# Altium PCB 莱洛三角形PCB_2022-04-17.pcbdoc (part 2 of 2)
Units mm, origin at the board's own origin, x right, y up, seen from the top; angles counter-clockwise.
Board outline 174.24 x 150.62 mm, 2 copper layers (Top Layer, Bottom Layer); 157 components, 93 nets, 468 pads, 212 vias.
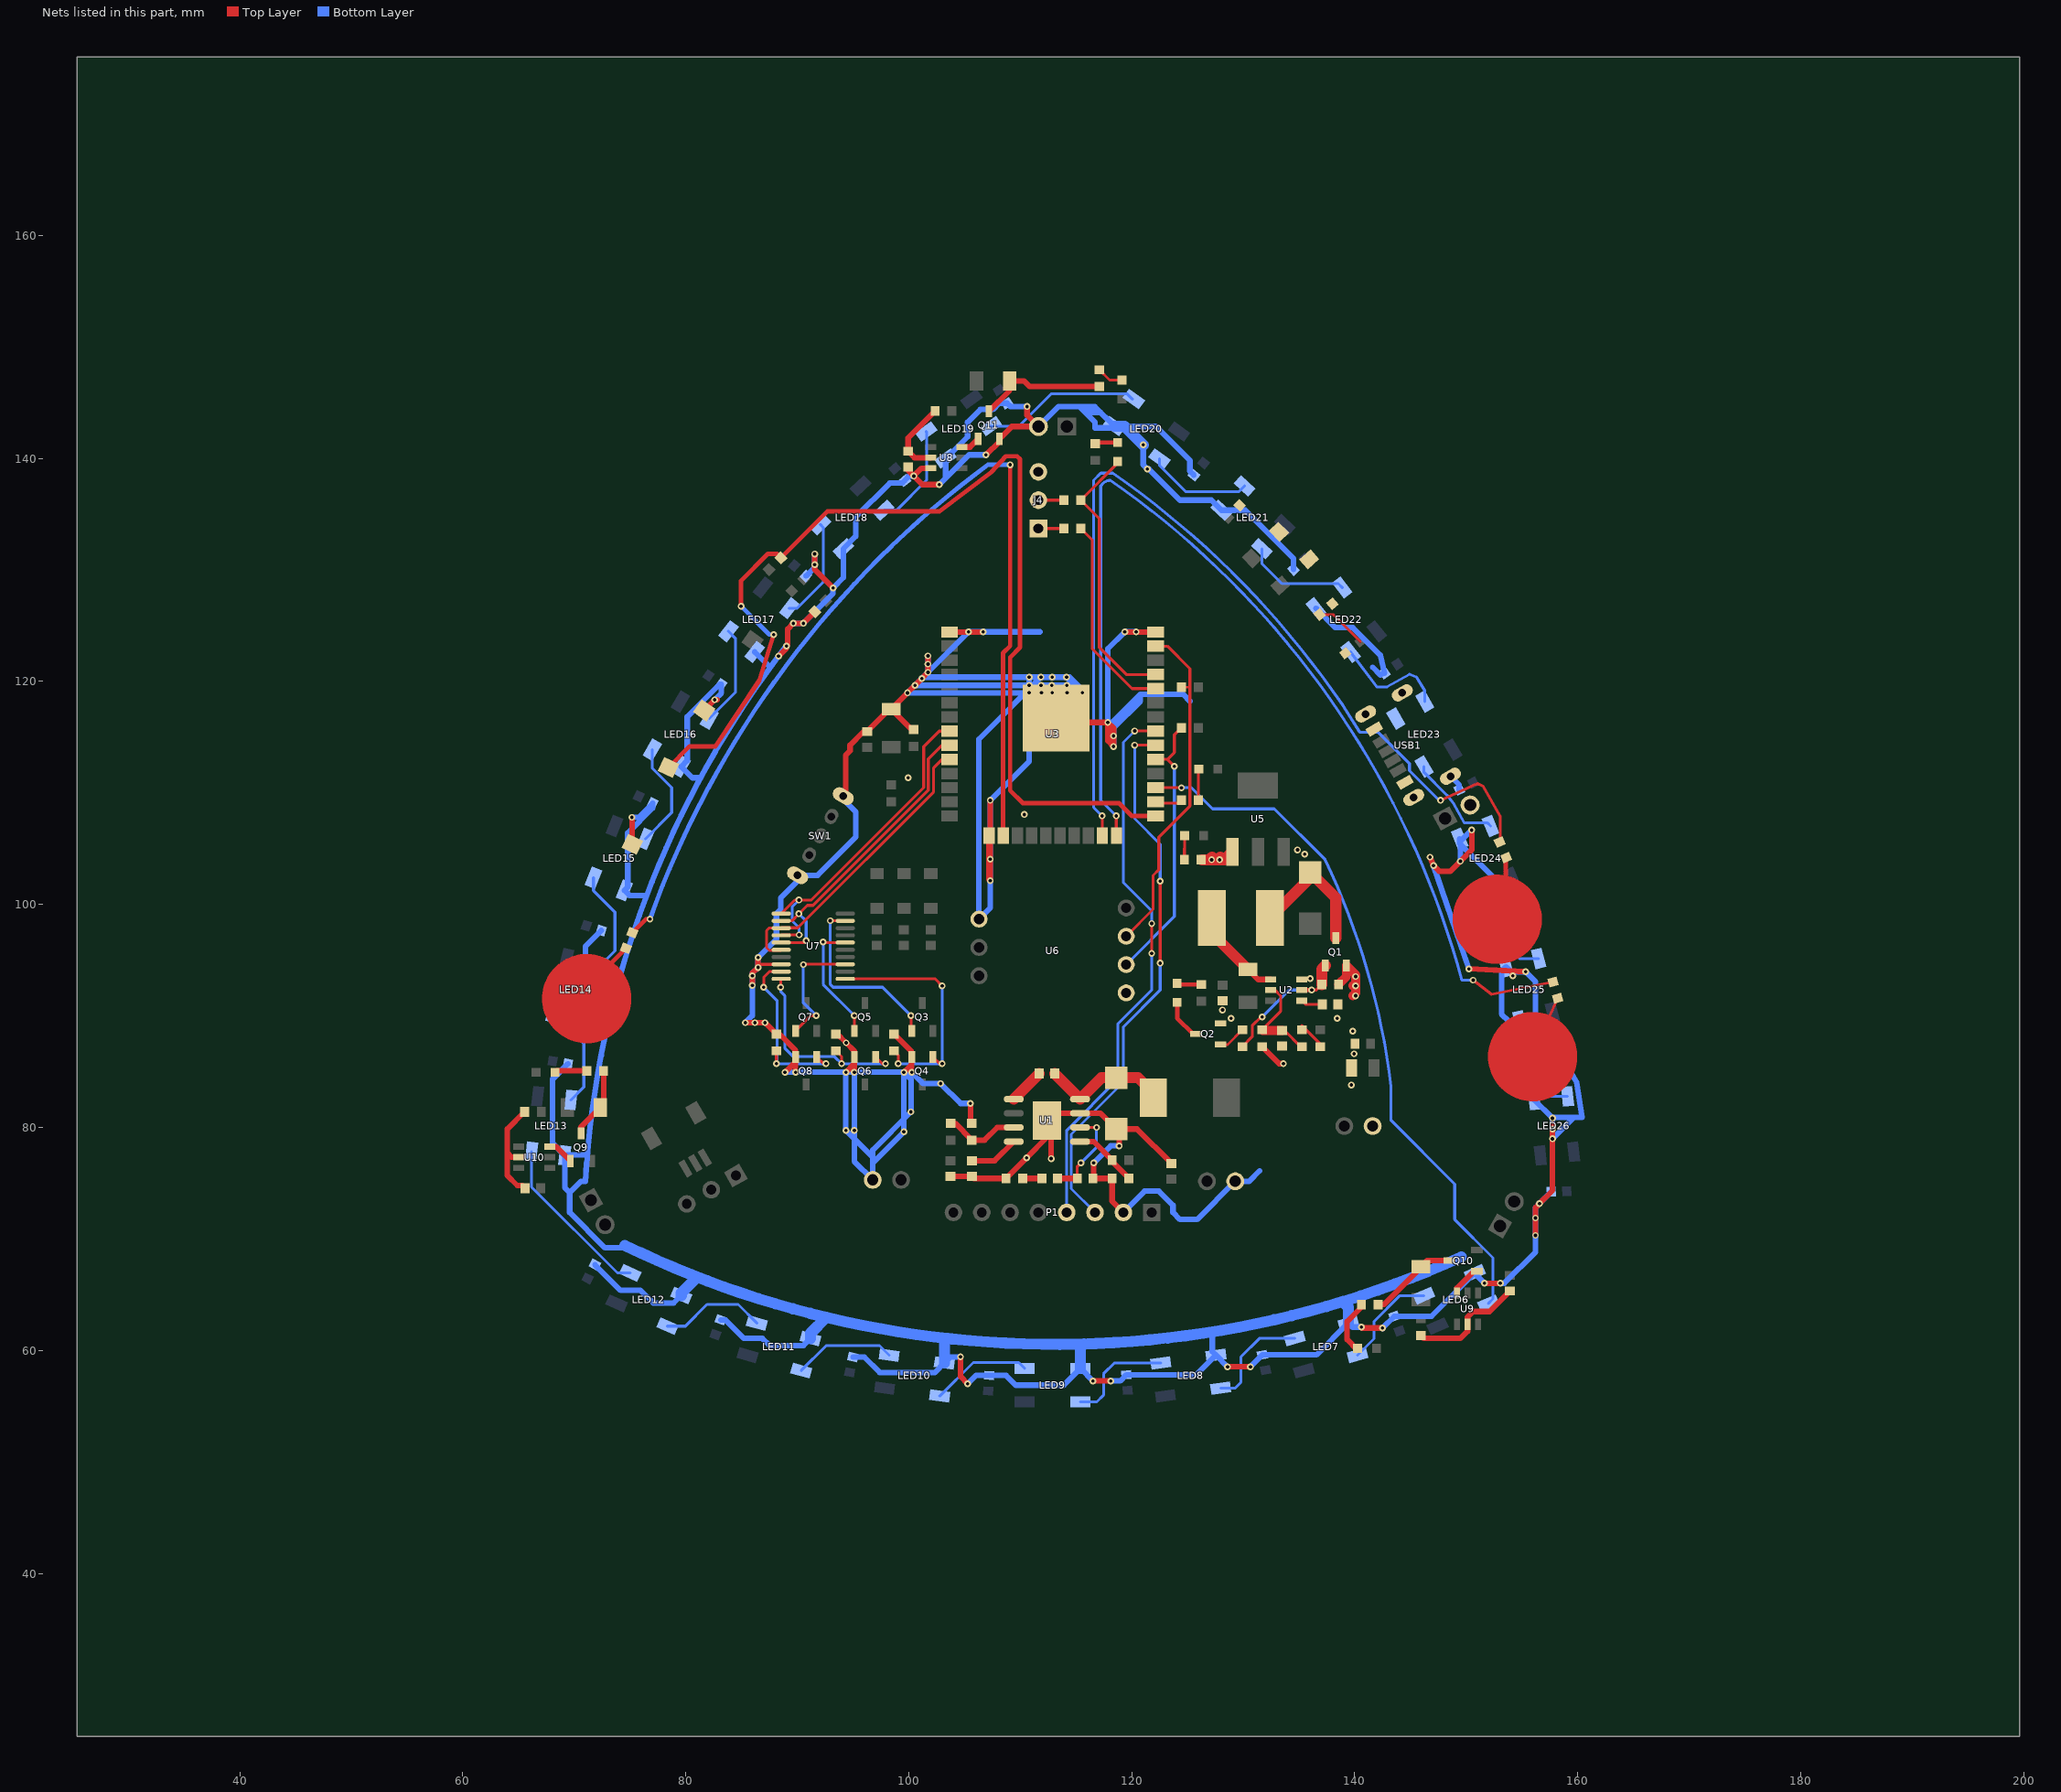
[diagram p2: the nets of this part, all layers, seen from the top]

## Via types
v1: diameter 0.61, hole 0.305, Top Layer to Bottom Layer, tented both sides, 202 vias
v2: diameter 0.7, hole 0.4, Top Layer to Bottom Layer, tented both sides, 6 vias
v3: diameter 0.8, hole 0.5, Top Layer to Bottom Layer, tented both sides, 4 vias

## Nets (pads, with @x,y where several pads share a name; then routed paths per layer and width w, separated by ;. In a path a pad name is that pad's centre, name@x,y a point inside that pad or via, vN(x,y) a via of type N, cw(c..) or ccw(c..) an arc to the next point about the centre after c; other vN are vias at no path point) (continued)
GND: C1.1 C4.2 C5.1 C7.2 C8.1 C10.1 C11.1 C12.1 C13.1 C15.1 C16.2 C17.2 C21.1 C22.1 C23.1 C24.1 C25.1 C26.1 C27.1 C28.1 C29.1 C30.1 C31.1 C32.1 C33.1 C34.1 C35.1 C36.1 C37.1 C38.1 C39.1 C40.1 C41.1 C43.1 C45.2 C48.2 D1.2 D2.2 D7.2 D8.1 J3.2 J4.3 J6.2 KEY1.2 KEY2.2 LED6.3 LED7.3 LED8.3 LED9.3 LED10.3 LED11.3 LED12.3 LED13.3 LED14.3 LED15.3 LED16.3 LED17.3 LED18.3 LED19.3 LED20.3 LED21.3 LED22.3 LED23.3 LED24.3 LED25.3 LED26.3 P1.2 Q1.2 Q2.2 Q4.2 Q6.2 Q8.2 Q11.2 R6.1 R8.1 R9.1 R10.1 R12.2 R15.1 R20.1 R31.1 R32.1 R33.1 R38.2 R40.1 SW1.4 SW1.5 U1.7 U1.9 U2.6 U3.1 U3.15 U3.38 U3.39 U5.1 U6.1 U6.7 U7.8 U8.3 USB1.0 USB1.A12 USB1.B12 | length 888.6
  Top Layer w0.3: v1(86.487,94.348) 86.766,94.627 U7.8@88.569,94.628
  Top Layer w0.5: v1(75.184,107.81) 75.183,105.427 KEY2.2@75.229,105.382 ; KEY1.2@81.64,117.398 82.595,118.351 v1@82.803,118.351 ; v1(85.344,89.395) v1(86.2,89.395) v1(87.113,89.395) 88.137,88.371 88.401,88.371 89.854,86.916 Q8.2@89.855,86.312 ; v1(85.979,92.728) v1(85.979,93.586) 85.979,93.84 v1(86.487,94.348) v1(86.487,95.237) ; v1(88.328,122.261) 89.027,122.96 v1(89.027,123.177) ; v1(88.9,84.95) 89.854,85.905 Q8.2@89.855,86.312 ; v1(89.027,123.177) 89.153,123.304 89.153,124.701 v1(89.661,125.209) v1(90.55,125.209) C13.1@91.58,126.238 ; v1(89.855,84.95) Q8.2@89.855,86.312 ; v1(91.567,131.432) v1(91.567,130.484) 91.567,130.035 v1(93.218,128.384) ; R32.1@93.471,88.371 93.608,88.371 v1(94.391,87.587) 95.125,86.852 Q6.2@95.125,86.312 ; SW1.5@94.125,109.71 94.36,109.946 94.36,113.398 94.741,113.779 94.741,114.287 95.95,115.496 96.265,115.496 98.282,117.51 D2.2@98.425,117.511 ; v1(94.361,84.95) 95.125,85.714 Q6.2@95.125,86.312 ; v1(95.126,84.95) Q6.2@95.125,86.312 ; R33.1@98.678,88.371 100.268,86.781 Q4.2@100.269,86.312 ; v1(99.568,84.95) 100.268,85.651 Q4.2@100.269,86.312 ; C48.2@99.948,139.242 99.948,138.925 v1(100.457,138.417) 101.157,139.118 U8.3@101.978,139.118 ; v1(100.269,84.95) Q4.2@100.269,86.312 ; R6.1@100.456,115.676 100.261,115.676 D2.2@98.425,117.511 ; v1(100.457,138.417) 101.219,137.655 v1(102.743,137.655) ; v1(101.727,122.288) v1(101.727,121.553) v1(101.727,120.813) v1(101.185,120.271) v1(100.556,119.642) v1(99.89,118.976) D2.2@98.425,117.511 ; U3.1@103.657,124.434 v1(106.68,124.447) ; C8.1@103.758,75.615 105.663,75.615 105.854,75.425 108.721,75.425 110.573,77.279 112.394,79.098 U1.9@112.394,80.632 ; v1(104.648,59.423) 104.648,57.645 v1(105.283,57.01) ; v1(105.537,82.156) 105.536,80.497 R10.1@105.663,80.37 ; v1(106.934,140.322) 108.137,141.526 Q11.2@108.138,141.754 109.247,142.862 J3.2@111.633,142.862 ; U3.15@107.213,106.172 107.213,102.227 v1(107.314,102.126) v1(107.314,109.334) ; v1(110.617,144.653) 110.617,143.878 J3.2@111.633,142.862 ; v1(112.776,77.203) 112.775,80.251 U1.9@112.394,80.632 ; U3.39@113.208,116.713 113.601,116.319 v1(117.856,116.319) ; v1(116.522,57.264) v1(118.11,57.264) ; v1(116.586,76.822) 116.585,75.491 116.522,75.425 118.246,75.425 118.246,73.383 P1.2@119.252,72.377 ; v1(118.872,78.346) 118.871,79.603 D1.2@118.617,79.857 ; v1(119.379,124.447) U3.38@122.149,124.434 ; C5.1@123.57,76.761 120.474,79.857 D1.2@118.617,79.857 ; v1(128.594,58.534) v1@130.649,58.534 ; R38.2@131.698,87.246 133.22,85.725 v1(133.604,85.725) ; v1(140.589,62.09) 140.666,62.013 v1(142.494,62.013) ; v1(146.756,104.239) v1(147.066,103.492) 147.574,102.984 148.59,102.984 v1(149.476,103.87) 150.495,104.889 v1(150.495,106.667) ; v1(150.241,94.221) v1(155.321,93.967) ; v1(151.638,66.027) v1(153.058,66.027) ; v1(156.21,70.316) v1(156.21,71.878) 156.21,72.815 v1(156.574,73.179) 157.734,74.339 157.734,80.251 ; U1.9@112.394,80.632 113.029,81.267 U1.7@115.366,81.267 117.208,81.267 D1.2@118.617,79.857 ; 117.856,114.668 v1(118.364,114.16) 118.364,115.811 v1(117.856,116.319) 117.856,114.668
  Top Layer w0.8: R40.1@138.548,92.824 139.252,93.53 Q1.2@139.253,94.51 140.08,93.682 v1(140.081,93.533) ; v1@139.827,91.808 140.081,92.062 v1(140.081,92.705) ; v1@139.827,92.705 140.081,92.959 v1(140.081,93.533)
  Top Layer w1: R20.1@126.314,104 126.961,104 v1@127.215,104.254 ; v1(127.165,104) 127.686,104 v1@127.94,104.254 ; v1(127.889,104) 128.305,104 U5.1@129.019,104.714
  Bottom Layer w0.3: LED20.3@118.433,142.888 119.354,142.887 v1(121.031,141.211)
  Bottom Layer w0.5: C28.1@69.445,85.704 68.071,84.333 68.071,78.575 LED13.3@69.157,77.489 ; 69.595,74.155 69.156,74.594 LED13.3@69.157,77.489 ; 71.18,77.551 69.217,77.551 LED13.3@69.157,77.489 ; C27.1@71.858,67.691 74.157,65.392 75.945,65.392 77.088,64.249 78.927,64.249 LED12.3@79.597,64.92 ; C29.1@72.425,97.658 70.997,96.23 70.997,89.563 71.19,89.367 73.04,89.367 ; 74.53,69.425 74.307,69.202 72.771,69.202 69.596,72.377 69.596,74.155 70.594,75.153 71.003,75.153 cw(c157.821,69.964) v1(89.027,123.177) ; v1(75.184,107.81) 75.77,107.81 77.04,109.08 77.04,108.651 74.802,106.413 74.802,101.567 LED15.3@74.498,101.262 74.952,100.807 76.502,100.807 ; 81.333,111.361 80.594,111.361 79.595,112.359 80.136,112.903 80.136,116.827 83.06,119.748 83.2,119.748 83.2,118.955 v1@82.595,118.351 ; C26.1@83.137,62.74 83.55,62.74 85.216,61.074 86.867,61.074 87.502,60.439 90.555,60.439 LED11.3@91.188,61.074 ; LED17.3@86.187,122.641 87.512,121.315 87.624,121.315 ; v1(86.487,95.237) 88.137,96.888 88.137,99.174 88.518,99.555 88.518,100.571 90.025,102.077 SW1.4@90.025,102.608 91.825,102.608 95.249,106.032 95.249,108.318 94.124,109.443 SW1.5@94.125,109.71 ; v1(86.487,95.237) v1(86.487,94.348) 85.979,93.84 v1(85.979,93.586) v1(85.979,92.728) 85.979,90.03 v1(85.344,89.395) v1(87.113,89.395) ; v1(89.661,125.209) v1(90.55,125.209) 93.218,127.876 v1(93.218,128.384) ; v1(89.855,84.95) v1(88.9,84.95) v1(100.269,84.95) 101.285,83.934 v1(102.87,83.934) 104.648,82.156 v1(105.537,82.156) ; C32.1@90.784,129.456 91.566,130.241 v1(91.567,131.432) ; v1(93.218,128.384) 94.144,129.308 94.144,131.904 95.249,133.012 95.249,134.734 98.297,137.782 99.412,137.782 C33.1@99.645,138.014 100.047,138.417 v1(100.457,138.417) ; v1(94.361,84.95) v1(94.361,79.743) 96.774,77.33 C7.2@96.774,75.298 ; C25.1@94.998,59.408 96.029,59.408 97.408,58.026 102.351,58.026 103.202,58.877 103.748,59.423 v1(104.648,59.423) ; v1(95.126,84.95) v1(95.122,79.743) 95.122,76.95 C7.2@96.774,75.298 ; v1(100.556,119.642) v1(110.806,119.641) v1(111.873,119.641) v1(112.838,119.641) v1(114.172,119.641) 114.914,119.641 v1(115.569,118.986) ; v1(101.185,120.271) 101.297,120.383 v1(110.806,120.383) ; v1(101.727,122.288) v1(101.727,120.813) ; v1(102.743,137.655) 103.314,138.226 103.314,139.971 105.282,141.94 105.282,143.243 106.425,144.386 107.568,144.386 108.132,144.95 108.828,144.95 109.125,144.653 v1(110.617,144.653) ; 103.313,138.225 105.41,140.322 v1(106.934,140.322) ; v1(105.283,57.01) 106.029,57.757 C24.1@107.205,57.756 108.729,57.757 109.6,56.883 113.903,56.883 115.402,58.384 v1(116.522,57.264) v1@116.585,57.264 ; v1(106.68,124.447) v1(105.361,124.447) ; J3.2@111.633,142.862 113.411,144.64 115.316,144.64 ; 111.76,124.447 v1(105.361,124.447) ; 115.579,144.377 116.713,143.243 116.713,142.735 ; 116.585,144.132 117.19,144.132 LED20.3@118.433,142.888 ; v1(116.586,76.822) 118.11,78.346 v1(118.872,78.346) ; 116.712,142.735 118.28,142.735 LED20.3@118.433,142.888 ; 116.918,144.132 115.824,144.132 115.316,144.64 ; v1(117.856,116.319) 118.364,115.811 ; v1(118.11,57.264) 118.968,57.264 C23.1@119.524,57.821 125.806,57.82 LED8.3@127.556,59.573 ; v1(118.364,114.16) v1(118.364,115.111) 118.364,115.811 ; P1.2@119.252,72.377 121.157,74.282 122.425,74.282 123.697,73.009 123.697,72.377 124.332,71.742 125.856,71.742 C4.2@129.286,75.171 ; v1(120.395,124.447) v1(119.379,124.447) 117.855,122.923 v1(117.856,116.319) 118.236,116.319 120.776,118.859 ; v1(121.031,141.211) 121.031,140.957 121.031,139.433 v1(121.412,139.052) 121.539,139.052 124.333,136.258 ; 124.332,136.258 127.149,136.258 LED21.3@128.048,135.359 130.184,135.359 134.505,131.041 C36.1@134.505,130.027 ; 125.221,118.224 124.586,118.859 120.776,118.859 ; C35.1@125.569,138.507 125.221,138.854 125.221,139.814 122.173,142.862 118.46,142.862 LED20.3@118.433,142.888 ; 127.23,61.668 127.23,59.898 LED8.3@127.556,59.573 ; v1@128.65,58.534 v1(128.594,58.534) LED8.3@127.556,59.573 ; C4.2@129.286,75.171 130.54,75.171 131.474,76.105 ; v1@130.555,58.534 v1(130.649,58.534) C22.1@131.714,59.599 136.573,59.598 139.425,62.451 139.786,62.09 v1(140.589,62.09) ; LED22.3@136.522,126.565 138.259,124.828 139.826,124.828 142.298,122.356 C37.1@142.679,120.749 142.298,120.578 141.604,121.272 ; v1@142.493,61.963 v1(142.494,62.013) 143.537,63.058 146.88,63.058 LED6.3@150.776,66.953 150.776,66.888 v1(151.638,66.027) v1@151.51,66.154 ; v1(147.066,103.492) v1(150.241,94.221) ; USB1.0@148.587,111.495 149.361,110.721 C38.1@149.361,110.291 ; LED24.3@149.41,105.888 149.41,105.465 153.034,101.841 153.034,98.496 C39.1@153.141,98.392 ; v1(149.476,103.87) 149.476,105.648 v1(150.495,106.667) ; v1(153.058,66.027) 153.416,66.027 156.21,68.821 v1(156.21,70.316) v1(156.21,71.878) 156.21,72.815 v1(156.574,73.179) ; v1@156.575,73.18 C41.1@157.619,74.224 ; v1(157.734,80.825) LED26.3@156.1,82.459 156.1,83.154 154.304,84.95 154.304,87.871 153.796,88.379 153.796,89.522 153.161,90.157 153.161,93.995 153.575,94.406 154.015,93.967 v1(155.321,93.967) 156.225,93.065 C40.1@156.225,86.464 157.992,84.696 159.511,84.696 159.892,84.061 160.4,80.886 ; C7.2@96.774,75.298 96.774,77.965 v1(100.203,81.394) 100.203,84.315 v1(99.568,84.95) v1(99.568,79.616) 96.774,76.822 C7.2@96.774,75.298 ; v1(101.727,120.813) v1(105.361,124.447) ; v1(101.727,120.813) v1(99.89,118.976) v1(110.806,118.983) v1(111.898,118.983) v1(112.863,118.984) v1(114.197,118.985) v1(115.569,118.986) ; v1(110.806,120.383) 110.806,112.826 v1(107.314,109.334) v1(107.314,104.049) v1(107.314,102.126) 107.314,99.694 U6.1@106.303,98.682 106.303,114.826 v1(111.86,120.383) ; v1(110.806,120.383) v1(111.86,120.383) ; v1(111.86,120.383) v1(112.876,120.383) v1(114.159,120.383) ; v1(114.159,120.383) v1(115.569,118.986) ; v1(114.159,120.383) 114.427,120.383 115.569,119.241 v1(115.569,118.986) ; 115.316,144.64 115.896,144.64 116.682,144.64 LED20.3@118.433,142.888 ; 118.364,115.811 120.776,118.223 120.776,118.859 ; v1(157.734,78.981) 159.639,80.886 160.401,80.886 157.795,80.886 v1(157.734,80.825) v1(157.734,79.862) v1(157.734,78.981)
  Bottom Layer w1: 74.53,69.425 ccw(c113.157,148.958) 149.572,68.388 ; LED12.3@79.597,64.92 79.598,65.14 81.038,66.581 ; LED11.3@91.188,61.074 91.188,61.536 92.613,62.961 ; LED10.3@103.202,58.877 103.202,60.802 103.471,61.074 ; LED9.3@115.402,58.384 115.402,60.269 115.712,60.579 ; LED20.3@118.433,142.888 119.354,142.887 v1(121.031,141.211) ; 138.927,64.381 139.425,63.883 LED7.3@139.425,62.451
  other v1: 110.574,77.278 139.7,83.807 139.954,86.601 139.827,88.633 128.905,89.789 138.43,89.789 128.143,90.534 140.081,91.808 136.017,93.345 154.178,93.586 135.509,104.508 134.874,104.889 110.363,108.064 99.949,111.366 82.594,118.351
GPIO0: KEY2.1 R13.1 U3.25 | length 96.6
  Top Layer w0.4: KEY2.1@78.44,112.27 80.347,114.178 82.674,114.178 86.613,120.129 v1(87.884,124.193) ; v1(84.963,126.733) 84.962,129.032 87.375,131.445 88.188,131.445 R13.1@88.544,131.089 92.697,135.242 102.745,135.242 107.444,138.798 ; 107.441,138.798 108.711,140.195 109.727,140.195 109.981,139.941 109.981,123.05 109.092,122.161 109.092,110.223 110.235,109.08 118.871,109.08 120.027,107.924 U3.25@122.149,107.924
  Bottom Layer w0.4: v1(84.963,126.733) 87.503,124.193 v1(87.884,124.193)
GPIO4: R21.1 U3.26 | length 2.4
  Top Layer w0.254: U3.26@122.148,108.94 122.288,109.08 R21.1@124.459,109.08
KEY1: R19.1 | length 16.3
  Top Layer w0.254: 156.694,88.206 R19.1@158.196,91.592
  Top Layer w4: 157.956,86.347 ccw(c155.956,86.347) 157.956,86.347
KEY2: R18.1 | length 15.4
  Top Layer w0.4: 153.542,101.333 153.542,104.155 R18.1@153.583,104.196
  Top Layer w4: 154.781,98.666 ccw(c152.781,98.666) 154.781,98.666
KEY3: R17.1 | length 16.4
  Top Layer w0.4: 72.168,93.258 72.168,93.583 R17.1@74.648,96.063
  Top Layer w4: 73.12,91.554 ccw(c71.12,91.554) 73.12,91.554
LED2_2: LED2.2 Q2.3 | length 3.3
  Top Layer w0.4: LED2.2@124.078,91.084 124.078,89.796 Q2.3@125.496,88.379
LED6_2: LED6.2 LED7.4 | length 9.1
  Bottom Layer w0.254: LED7.4@140.251,59.567 141.731,61.049 141.731,62.598 144.053,64.919 LED6.2@146.209,64.919
LED7_2: LED7.2 LED8.4 | length 9.8
  Bottom Layer w0.254: LED8.4@127.975,56.601 129.257,56.601 129.793,57.137 129.793,59.423 131.444,61.074 LED7.2@134.617,61.074
LED9_4: LED8.2 LED9.4 | length 9.8
  Bottom Layer w0.254: LED9.4@115.402,55.384 116.865,55.384 117.474,55.994 117.474,57.899 118.452,58.877 LED8.2@122.605,58.877
LED10_2: LED10.2 LED11.4 | length 9.2
  Bottom Layer w0.254: LED11.4@90.362,58.188 92.61,60.439 97.383,60.439 LED10.2@98.25,59.572
LED10_4: LED9.2 LED10.4 | length 9.1
  Bottom Layer w0.254: LED10.4@102.784,55.905 105.793,58.915 109.872,58.915 LED9.2@110.403,58.384
LED11_2: LED11.2 LED12.4 | length 9.5
  Bottom Layer w0.254: LED12.4@78.377,62.179 79.974,62.179 81.914,64.122 84.711,64.122 LED11.2@86.382,62.451
LED12_2: LED12.2 LED13.4 | length 15.2
  Bottom Layer w0.254: LED13.4@66.175,77.818 66.174,74.655 73.878,66.954 LED12.2@75.031,66.954
LED14_4: LED13.2 LED14.4 | length 9.5
  Bottom Layer w0.254: LED14.4@68.09,90.303 70.865,87.525 70.865,83.619 LED13.2@69.706,82.459
LED15_2: LED15.2 LED16.4 | length 9.7
  Bottom Layer w0.254: LED15.2@76.396,105.888 78.739,108.232 78.739,110.477 77.005,112.212 LED16.4@77.004,113.873
LED15_4: LED14.2 LED15.4 | length 9.4
  Bottom Layer w0.254: LED15.4@71.724,102.4 71.724,101.239 73.659,99.301 73.659,95.836 LED14.2@72.232,94.407
LED16_2: LED16.2 LED17.4 | length 9
  Bottom Layer w0.254: LED16.2@82.117,116.677 84.454,119.014 84.454,123.875 LED17.4@83.832,124.5
LED17_2: LED17.2 LED18.4 | length 9.3
  Bottom Layer w0.254: LED17.2@89.285,126.565 90.002,126.565 92.328,128.892 92.328,133.814 LED18.4@92.072,134.074
LED19_4: LED18.2 LED19.4 | length 9.3
  Bottom Layer w0.254: LED18.2@97.759,135.359 98.922,135.359 101.599,138.036 101.599,142.369 LED19.4@101.562,142.407
LED20_2: LED20.2 LED21.4 | length 9.4
  Bottom Layer w0.254: LED20.2@122.493,139.971 122.493,139.369 124.84,137.02 129.613,137.02 LED21.4@130.12,137.528
LED20_4: LED19.2 LED20.4 | length 14.2
  Bottom Layer w0.254: LED19.2@107.246,142.887 109.867,142.887 112.763,145.783 119.598,145.783 LED20.4@120.058,145.326
LED21_2: LED21.2 LED22.4 | length 9.4
  Bottom Layer w0.254: LED21.2@131.663,131.905 131.663,130.578 133.476,128.765 138.533,128.765 LED22.4@138.876,128.424
LED22_2: LED22.2 LED23.4 | length 10.2
  Bottom Layer w0.254: LED22.2@139.621,122.641 141.98,119.517 142.897,119.517 144.906,120.637 145.541,120.383 146.278,119.184 LED23.4@146.279,118.19
LED24_4: LED23.2 LED24.4 | length 8.8
  Bottom Layer w0.254: LED23.2@146.212,112.36 146.212,111.841 148.254,109.796 148.843,109.08 149.831,107.302 151.909,107.302 LED24.4@152.186,107.026
LED25_2: LED25.2 LED26.4 | length 9.4
  Bottom Layer w0.254: LED25.2@154.81,89.562 155.066,89.303 155.066,85.331 157.609,82.788 LED26.4@159.082,82.788
LED25_4: LED24.2 LED25.4 | length 9.3
  Bottom Layer w0.254: LED24.2@151.308,101.262 152.145,100.424 152.145,97.777 154.774,95.148 LED25.4@156.481,95.148
LED27_2: LED27.2 R23.2 | length 2.9
  Top Layer w0.5: LED27.2@68.287,84.95 68.414,85.077 R23.2@71.129,85.077
LO1: Q4.1 R33.2 U7.11 | length 22.3
  Top Layer w0.254: U7.11@94.312,93.329 102.366,93.329 v1(102.997,92.697) ; R33.2@98.678,86.865 99.059,86.484 v1(99.06,85.712) ; Q4.1@102.169,86.312 102.77,85.712 v1(102.997,85.712)
  Bottom Layer w0.254: v1(99.06,85.712) v1(102.997,85.712) v1(102.997,92.697)
LO2: Q6.1 R32.2 U7.10 | length 18.5
  Top Layer w0.254: v1(88.518,92.57) 88.518,93.279 U7.10@88.569,93.329 ; R32.2@93.471,86.865 93.979,86.357 v1(93.98,85.712) ; Q6.1@97.026,86.312 97.627,85.712 v1(97.917,85.712)
  Bottom Layer w0.254: v1(88.518,92.57) 88.518,92.189 88.881,91.826 88.881,87.128 89.662,86.347 93.345,86.347 v1(93.98,85.712) v1(97.917,85.712)
LO3: Q8.1 R31.2 U7.9 | length 16.7
  Top Layer w0.254: v1(86.994,92.57) 86.994,93.459 87.502,93.967 U7.9@88.569,93.978 ; v1(88.138,85.712) R31.2@88.137,86.865 ; Q8.1@91.755,86.312 92.356,85.712 v1(92.583,85.712)
  Bottom Layer w0.254: v1(86.994,92.57) 88.183,91.381 88.183,85.757 v1(88.138,85.712) v1(92.583,85.712)
M0_IN1: U3.8 U7.1 U7.4 | length 29.3
  Top Layer w0.254: U7.4@88.569,97.228 88.61,97.269 v1(90.17,97.269) ; U7.1@88.572,99.179 89.781,100.391 v1(90.16,100.39) 91.259,100.391 101.345,110.477 101.345,114.16 102.727,115.544 U3.8@103.657,115.544
  Bottom Layer w0.254: v1(90.16,100.39) 89.535,99.765 89.535,98.539 90.17,97.904 v1(90.17,97.269)
M0_IN2: U3.9 U7.2 U7.5 | length 28.2
  Top Layer w0.254: U7.5@88.569,96.578 90.621,96.578 v1(90.805,96.761) ; U7.2@88.569,98.528 89.524,98.529 v1(90.157,99.161) ; v1(90.157,99.161) 90.911,99.915 91.419,99.915 91.551,100.047 101.754,110.251 101.754,113.045 102.984,114.274 U3.9@103.657,114.274
  Bottom Layer w0.254: v1(90.157,99.161) 90.805,98.513 v1(90.805,96.761)
M0_IN3: U3.10 U7.3 U7.6 | length 27
  Top Layer w0.254: U7.6@88.569,95.928 88.513,95.872 87.502,95.872 87.248,96.126 87.248,97.65 87.477,97.879 U7.3@88.569,97.878 88.595,97.904 90.042,97.904 102.234,110.096 102.234,112.255 102.984,113.004 U3.10@103.657,113.004
Q1_3: D3.2 L2.2 Q1.3 | length 12.4
  Top Layer w1: L2.2@132.397,98.793 136.016,102.412 136.016,102.872 138.302,100.586 Q1.3@138.303,96.98
Q9_3: Q9.3 R23.1 R25.1 | length 6.5
  Top Layer w0.5: Q9.3@70.612,79.454 70.611,80.043 R25.1@72.345,81.775 72.636,82.064 R23.1@72.635,85.077
Q10_3: Q10.3 R22.1 R27.1 | length 8.1
  Top Layer w0.5: R22.1@142.104,64.122 142.62,64.122 145.922,67.424 R27.1@145.923,67.506 146.476,68.059 Q10.3@148.498,68.059
Q11_3: Q11.3 R24.1 R30.1 | length 11.7
  Top Layer w0.5: Q11.3@107.188,144.224 109.047,146.083 R30.1@109.048,146.939 110.362,146.939 110.86,146.441 R24.1@117.093,146.441
R1_2: J4.1 R1.2 | length 2.3
  Top Layer w0.254: J4.1@111.633,133.718 R1.2@113.928,133.718
R2_2: J4.2 R2.2 | length 2.3
  Top Layer w0.254: J4.2@111.633,136.258 R2.2@113.928,136.258
R7_1: LED1.1 R7.1 | length 2.1
  Top Layer w0.4: R7.1@116.712,141.33 116.811,141.427 LED1.1@118.745,141.427
R8_2: C9.1 R8.2 | length 1.7
  Top Layer w0.5: R8.2@110.227,75.425 C9.1@111.953,75.425
R14_1: LED2.1 R14.1 | length 2.2
  Top Layer w0.4: LED2.1@124.078,92.786 124.109,92.816 R14.1@126.237,92.816
R15_2: LED3.2 R15.2 | length 4.7
  Top Layer w0.254: R15.2@136.837,125.995 138.076,125.994 140.497,123.573
R16_2: L2.1 R16.2 U2.1 | length 8.4
  Top Layer w0.5: R16.2@130.429,94.176 131.338,93.266 U2.1@132.458,93.266
  Top Layer w1: L2.1@127.191,98.793 127.19,97.414 R16.2@130.429,94.176
R20_2: LED4.2 R20.2 | length 2.2
  Top Layer w0.254: R20.2@124.723,104 LED4.2@124.752,106.159
R21_2: LED5.2 R21.2 | length 2.8
  Top Layer w0.254: R21.2@125.975,109.334 125.976,112.049 LED5.2@126.022,112.128
R22_2: LED28.2 R22.2 | length 5
  Top Layer w0.5: LED28.2@140.245,60.058 139.318,60.985 139.318,62.598 140.598,63.878 R22.2@140.598,64.122
R24_2: LED29.2 R24.2 | length 2.4
  Top Layer w0.254: R24.2@117.094,147.946 118.013,147.028 LED29.2@119.126,147.028
R37_1: C45.1 R37.1 R38.1 U2.2 | length 9
  Top Layer w0.254: R38.1@131.698,88.752 133.349,90.403 133.349,91.808 132.841,92.316 U2.2@132.458,92.316 ; C45.1@133.476,88.699 133.7,88.699 135.153,87.246 R37.1@135.254,87.246
  Top Layer w0.8: R38.1@131.698,88.752 131.752,88.699 C45.1@133.476,88.699
R37_2: R37.2 R39.1 | length 2.6
  Top Layer w0.254: R37.2@135.254,89.133 136.905,87.482 R39.1@136.905,87.246
R41_1: Q2.1 R41.1 | length 2.5
  Top Layer w0.254: Q2.1@127.995,87.429 128.6,87.429 R41.1@129.92,88.752
RGB_IN: LED6.4 U3.27 | length 62.6
  Top Layer w0.254: U3.27@122.149,110.464 v1(124.46,110.464)
  Bottom Layer w0.254: v1(124.46,110.464) 125.361,110.464 127.253,108.572 132.78,108.572 137.347,104.005 ; 137.347,104.005 cw(c77.965,75.719) 143.256,83.68 ; 143.255,83.68 143.255,80.632 148.97,74.917 148.97,71.742 152.399,68.313 152.399,64.617 LED6.4@151.996,64.213
RXD0: R1.1 U3.34 | length 18.4
  Top Layer w0.254: R1.1@115.434,133.718 116.458,132.694 116.458,122.923 120.027,119.354 U3.34@122.149,119.354
SCL_0: P1.3 U3.30 | length 48.9
  Top Layer w0.254: v1(120.268,114.287) U3.30@122.149,114.274 ; v1(122.555,94.729) v1(122.555,102.095)
  Bottom Layer w0.254: P1.3@116.712,72.377 114.579,74.508 114.579,79.387 119.252,84.061 119.252,89.014 122.555,92.316 v1(122.555,94.729) ; v1(120.268,114.287) 120.268,107.683 122.555,105.396 v1(122.555,102.095)
SCL_1: R35.1 U3.29 U6.6 | length 24.9
  Top Layer w0.254: U3.29@122.149,113.004 123.202,113.004 ; v1(123.825,112.382) 123.202,113.004 ; R35.1@124.469,115.811 124.409,115.811 123.824,115.227 123.824,113.627 123.202,113.004
  Bottom Layer w0.254: U6.6@119.503,94.602 123.825,98.924 v1(123.825,112.382)
SDA_0: P1.4 U3.31 | length 49.7
  Top Layer w0.254: v1(120.269,115.557) U3.31@122.149,115.544 ; v1(121.793,95.618) v1(121.793,98.285)
  Bottom Layer w0.254: P1.4@114.172,72.377 114.172,79.743 118.744,84.315 118.744,89.268 121.793,92.316 v1(121.793,95.618) ; v1(120.269,115.557) 119.252,114.541 119.252,101.968 121.793,99.427 v1(121.793,98.285)
SDA_1: R34.1 U3.37 U6.5 | length 31
  Top Layer w0.254: U6.5@119.504,97.142 121.919,99.56 121.919,102.603 122.427,103.111 122.427,106.032 125.221,108.826 125.221,121.145 123.202,123.164 U3.37@122.149,123.164 ; R34.1@124.469,119.494 125.221,119.476
TXD0: LED1.2 R2.1 U3.35 | length 24.8
  Top Layer w0.254: LED1.2@118.745,139.725 118.744,139.57 R2.1@115.434,136.258 117.093,134.599 117.093,123.05 119.519,120.624 U3.35@122.149,120.624
U1_1: C2.2 U1.1 | length 3.2
  Top Layer w1: U1.1@109.423,82.537 C2.2@111.696,84.823
U1_3: R5.1 R10.2 U1.3 | length 6.8
  Top Layer w0.5: R5.1@103.758,80.37 104.157,80.37 105.663,78.864 106.816,78.864 107.949,79.997 U1.3@109.423,79.997
U1_4: C12.2 U1.4 | length 4.5
  Top Layer w0.5: C12.2@105.663,77.015 107.711,77.015 U1.4@109.423,78.727
U1_5: R4.1 R9.2 U1.5 | length 5.8
  Top Layer w0.5: U1.5@115.366,78.727 116.595,78.727 118.246,77.076 118.246,76.931 R9.2@119.752,75.425
U1_6: C9.2 C10.2 U1.6 | length 8.5
  Top Layer w0.254: C10.2@115.121,75.425 115.12,76.499 v1(115.443,76.822) ; U1.6@115.366,79.997 v1(116.84,79.997)
  Top Layer w0.5: C9.2@113.352,75.425 C10.2@115.121,75.425
  Bottom Layer w0.254: v1(115.443,76.822) 116.84,78.219 v1(116.84,79.997)
U1_8: C2.1 D1.1 L1.1 U1.8 | length 11
  Top Layer w1: C2.1@113.095,84.823 U1.8@115.366,82.537 117.286,84.457 118.617,84.457 120.573,84.457 L1.1@121.856,83.172
U2_4: C43.2 U2.4 | length 2
  Top Layer w0.254: U2.4@135.258,91.366 135.579,91.046 C43.2@137.096,91.046
U2_5: Q1.1 R40.2 R41.2 U2.5 | length 13.6
  Top Layer w0.254: R41.2@129.92,87.246 130.809,88.135 130.809,89.123 131.592,89.903 v1(131.699,89.903) ; U2.5@135.258,92.316 135.272,92.329 v1(136.144,92.329) 136.547,92.329 R40.2@137.042,92.824
  Top Layer w0.4: U2.5@135.258,92.316 v1(136.144,92.329)
  Top Layer w1: R40.2@137.042,92.824 137.042,94.198 Q1.1@137.353,94.51
  Bottom Layer w0.254: v1(131.699,89.903) 134.125,92.329 v1(136.144,92.329)
U3_16: R17.2 U3.16 | length 89.4
  Top Layer w0.4: R17.2@75.212,97.46 76.436,98.681 v1(76.791,98.682) ; U3.16@108.483,105.918 108.457,105.943 108.457,122.542 109.092,123.177 109.092,134.226 ; 109.093,134.226 v1(109.093,139.433)
  Bottom Layer w0.4: v1(76.791,98.682) cw(c159.131,69.075) 107.095,139.422 ; 107.096,139.423 v1(109.093,139.433)
U3_23: R18.2 U3.23 | length 86.3
  Top Layer w0.254: v1(117.348,107.937) 117.347,106.197 U3.23@117.373,106.172 ; v1(147.701,109.334) 151.002,110.858 151.51,110.604 153.034,107.937 153.034,105.623 R18.2@152.995,105.582
  Bottom Layer w0.254: v1(117.348,107.937) 116.585,108.699 116.585,138.036 117.225,138.676 118.32,138.676 ; 118.32,138.675 cw(c72.136,72.377) 137.033,120.51 138.937,117.843 140.461,115.43 142.112,115.43 144.906,112.636 144.906,112.001 147.573,109.334 v1(147.701,109.334)
U3_24: R19.2 U3.24 | length 97.6
  Top Layer w0.254: v1(118.618,107.937) 118.617,106.197 U3.24@118.643,106.172 ; v1(150.622,93.205) 152.272,91.935 R19.2@157.78,93.04
  Bottom Layer w0.254: 117.22,137.528 117.22,109.334 v1(118.618,107.937) ; 117.231,137.522 cw(c118.11,137.02) 118.108,138.033 cw(c72.136,72.25) 149.606,93.205 149.733,93.205 v1(150.622,93.205)
U7_13: Q7.1 U7.13 | length 11.2
  Top Layer w0.254: Q7.1@89.855,88.668 91.216,90.03 v1(91.694,90.03) ; v1(90.551,94.602) 90.578,94.627 U7.13@94.312,94.627
  Bottom Layer w0.254: v1(90.551,94.602) 90.551,91.173 v1(91.694,90.03)
U7_16: Q5.1 U7.16 | length 11.1
  Top Layer w0.254: v1(92.329,96.634) 92.384,96.578 U7.16@94.312,96.578 ; v1(95.123,90.03) Q5.1@95.125,88.668
  Bottom Layer w0.254: v1(92.329,96.634) 92.329,92.824 v1(95.123,90.03)
U7_19: Q3.1 U7.19 | length 16.8
  Top Layer w0.254: v1(92.963,98.539) U7.19@94.312,98.529 ; v1(100.203,90.03) 100.202,88.735 Q3.1@100.269,88.668
  Bottom Layer w0.254: v1(92.963,98.539) 92.963,92.824 93.217,92.57 97.662,92.57 v1(100.203,90.03)
U8_2: C48.1 R29.1 U8.2 | length 6.9
  Top Layer w0.5: U8.2@101.978,140.068 100.522,140.068 99.948,140.642 99.948,141.838 R29.1@102.371,144.259
U8_6: Q11.1 U8.6 | length 1.8
  Top Layer w0.5: U8.6@104.778,141.018 105.501,141.018 Q11.1@106.238,141.754
U9_2: C47.1 R28.1 U9.2 | length 10.6
  Top Layer w0.5: R28.1@145.922,61.338 146.186,61.074 149.478,61.074 150.113,61.709 U9.2@150.114,62.341 150.113,62.979 150.621,63.487 152.084,63.487 C47.1@153.923,65.328
U9_6: Q10.1 U9.6 | length 2.9
  Top Layer w0.5: U9.6@149.164,65.141 149.163,65.585 150.687,67.109 Q10.1@150.968,67.109
U10_2: C46.1 R26.1 U10.2 | length 9.6
  Top Layer w0.5: U10.2@65.021,77.33 64.388,77.33 64.007,77.711 ; R26.1@65.541,81.394 64.007,79.862 64.007,77.711 ; C46.1@65.595,74.536 65.341,74.79 64.896,74.79 64.007,75.679 64.007,77.711
U10_6: Q9.1 U10.6 | length 2.4
  Top Layer w0.5: U10.6@67.821,78.28 68.366,78.28 Q9.1@69.662,76.984
pads on no net: CN2.4 CN2.5 LED26.2 P1.5 P1.6 P1.7 P1.8 SW1.1 U3.4 U3.5 U3.7 U3.11 U3.12 U3.13 U3.14 U3.17 U3.18 U3.19 U3.20 U3.21 U3.22 U3.28 U3.32 U3.33 U3.36 U6.2 U6.4 U8.1 U8.4 U8.5 U9.1 U9.4 U9.5 U10.1 U10.4 U10.5 USB1.A5 USB1.B5

## Polygon pours and split planes (outlines as drawn)
GND on Bottom Layer (solid): 44.958,38.1 40.513,42.545 40.513,158.727 38.989,159.512 40.005,159.512 39.497,160.02 48.768,160.02 49.276,159.512 176.149,159.512 184.277,151.384 184.277,50.673 171.704,38.1 44.958,38.1
GND on Top Layer (solid): 133.096,91.808 133.096,90.538 129.286,90.538 129.286,91.808 129.032,92.062 128.651,92.062 128.651,93.332 131.699,93.332 131.699,91.808
GND on Top Layer (solid): 125.984,119.367 125.857,119.24 125.857,115.811 125.857,113.779 127.254,112.255 127.254,109.461 135.636,109.461 132.969,115.303 130.556,119.113 127.635,122.034 125.857,122.034
GND on Top Layer (solid): 46.101,156.21 170.434,156.21 178.435,148.209 178.435,53.848 168.402,43.815 42.037,43.815 38.1,39.878 38.1,142.113 48.133,152.146 50.165,152.146
GND on Top Layer (solid): 186.944,110.49 98.068,141.605 74.803,141.605 62.27,154.138 53.086,157.353 59.055,157.353 53.086,163.322 134.112,163.322 140.081,157.353 146.685,157.353 162.433,141.605 155.829,141.605 186.944,110.49

## Other copper
Top Layer:
  drawing of 398 lines, arcs and shapes, not listed
Bottom Layer:
  region net +3.3V: 114.046,139.687 115.697,139.687 115.632,139.622 115.632,121.973 114.427,123.177 112.49,123.177 114.046,124.733
  region net SCL_1: 119.455,95.362 120.264,94.554 120.326,95.246 120.147,95.425
  region net SCL_0: 115.927,72.327 116.761,73.163 116.044,73.224 115.864,73.044
  region net SDA_0: 114.763,72.897 113.582,72.897 114.045,73.449 114.299,73.449
  region net B3+: 139.784,79.773 138.627,79.455 138.799,78.921 139.908,79.226
  region net +5V: 121.589,102.114 121.266,101.791 121.402,101.625 121.755,101.978
  region net +5V: 121.084,101.866 121.083,102.323 120.87,102.345 120.87,101.845
  region net +5V: 120.449,101.866 120.448,102.323 120.235,102.345 120.235,101.845
  region net +5V: 120.852,101.866 120.852,102.324 121.065,102.345 121.065,101.845
  region net +5V: 123.419,99.757 122.961,99.757 122.94,99.97 123.44,99.97
  region net +5V: 123.419,100.116 122.961,100.115 122.94,99.902 123.44,99.902
  region net +5V: 123.419,100.519 122.961,100.519 122.94,100.732 123.44,100.732
  region net B1+: 145.959,107.107 146.406,107.383 146.267,107.585 145.841,107.322
  region net +5V: 123.419,100.877 122.961,100.877 122.94,100.664 123.44,100.664
  region net +5V: 122.989,101.308 122.988,100.85 122.775,100.829 122.775,101.329
  region net +5V: 132.324,83.98 132.323,83.38 132.043,83.28 132.044,84.08
  region net +5V: 132.324,83.98 132.323,83.38 132.043,83.28 132.044,84.08
  region net +5V: 131.927,83.38 131.927,83.98 132.207,84.08 132.208,83.28
  region net +5V: 131.398,83.98 131.398,83.38 131.118,83.28 131.118,84.08
  region net +5V: 131.398,83.98 131.398,83.38 131.118,83.28 131.118,84.08
  region net +5V: 131.927,83.38 131.927,83.98 132.207,84.08 132.208,83.28
  region net +5V: 131.057,83.38 131.057,83.98 131.337,84.08 131.337,83.28
  region net +5V: 131.057,83.38 131.057,83.98 131.337,84.08 131.337,83.28
  region net +5V: 130.817,84.079 130.393,83.655 130.124,83.782 130.69,84.348
  region net +3.3V: 127.533,106.535 127.109,106.959 126.946,106.726 127.3,106.372
  region net U2_5: 135.943,92.1 135.943,92.557 135.729,92.456 135.729,92.202
  region net U2_5: 132.003,89.884 131.68,90.207 131.903,90.286 132.082,90.107
  region net 5VIN: 130.572,92.799 130.572,92.341 130.358,92.32 130.358,92.82
  region net 5VIN: 131.077,92.55 130.755,92.874 130.89,93.04 131.244,92.686
  region net 5VIN: 129.861,92.799 129.86,92.341 129.647,92.32 129.647,92.82
  region net 5VIN: 130.264,92.341 130.264,92.799 130.477,92.82 130.477,92.32
  region net 5VIN: 129.488,92.341 129.488,92.799 129.701,92.82 129.701,92.32
  region net 5VIN: 141.25,85.152 141.707,85.152 141.728,85.365 141.228,85.365
  region net 5VIN: 141.25,86.041 141.707,86.041 141.728,86.254 141.228,86.254
  region net 5VIN: 141.25,85.637 141.707,85.637 141.728,85.424 141.228,85.424
  region net 5VIN: 141.25,87.184 141.707,87.184 141.728,87.397 141.228,87.397
  region net 5VIN: 141.25,86.78 141.707,86.78 141.728,86.567 141.228,86.567
  region net 5VIN: 141.25,88.05 141.707,88.05 141.728,87.837 141.228,87.837
  region net 5VIN: 141.497,88.556 141.174,88.232 141.008,88.368 141.361,88.722
  region net +3.3V: 115.889,122.135 115.438,122.208 115.447,122.422 115.947,122.342
  region net +3.3V: 114.731,123.158 114.408,123.481 114.544,123.647 114.897,123.294
  region net B1+: 140.798,119.841 140.504,119.406 140.306,119.55 140.591,119.972
  region net B1+: 146.186,107.898 145.661,107.898 145.673,108.143 146.173,108.143
  region net B1+: 145.821,107.332 146.268,107.607 146.386,107.391 145.959,107.13
  region net B1+: 146.186,108.213 145.661,108.213 145.673,107.968 146.173,107.968
  region net +3.3V: 115.496,139.916 115.495,139.458 115.282,139.487 115.282,139.887
  region net +3.3V: 115.926,139.485 115.468,139.485 115.447,139.272 115.947,139.272
  region net +3.3V: 115.083,139.458 115.083,139.916 115.297,139.887 115.297,139.487
  region net +3.3V: 114.68,139.916 114.68,139.458 114.467,139.487 114.467,139.887
  region net +3.3V: 115.11,139.485 114.653,139.485 114.632,139.272 115.132,139.272
  region net +3.3V: 114.065,139.991 113.742,139.668 113.611,139.839 113.894,140.122
  region net +3.3V: 114.248,139.458 114.248,139.916 114.461,139.887 114.461,139.487
  region net +3.3V: 114.275,139.485 113.817,139.485 113.796,139.272 114.296,139.272
  region net U3_23: 147.653,109.635 147.408,109.249 147.281,109.446 147.421,109.666
  region net +3.3V: 129.549,115.593 129.226,115.27 129.362,115.104 129.715,115.457
  region net +3.3V: 129.264,115.878 128.941,115.555 128.775,115.69 129.129,116.044
  region net +3.3V: 130.321,114.821 129.998,114.498 130.133,114.332 130.487,114.686
  region net +3.3V: 130.036,115.106 129.712,114.783 129.546,114.919 129.9,115.273
  region net +3.3V: 130.942,114.201 130.618,113.877 130.754,113.711 131.108,114.065
  region net +3.3V: 130.657,114.486 130.333,114.162 130.167,114.298 130.521,114.652
  region net +3.3V: 131.293,112.867 130.835,112.867 130.814,112.654 131.314,112.654
  region net +3.3V: 131.293,113.27 130.835,113.27 130.814,113.484 131.314,113.484
  region net +3.3V: 131.293,112.457 130.835,112.456 130.814,112.67 131.314,112.67
  region net RGB_IN: 124.662,110.693 124.662,110.235 124.875,110.337 124.875,110.591
  region net U1_6: 115.747,76.803 115.424,77.126 115.647,77.205 115.826,77.026
  region net U1_6: 117.069,79.795 116.611,79.795 116.713,79.582 116.967,79.582
  region net LO1: 103.226,92.495 102.768,92.495 102.87,92.282 103.124,92.282
  region net +5V: 120.217,101.866 120.217,102.324 120.43,102.345 120.43,101.845
  region net +3.3V: 124.129,86.836 123.806,87.159 123.942,87.325 124.295,86.972
  region net +3.3V: 124.129,86.874 123.806,86.551 123.942,86.385 124.295,86.738
  region net +3.3V: 125.197,73.468 124.739,73.467 124.718,73.681 125.218,73.681
  region net SCL_0: 120.04,114.085 120.497,114.085 120.395,113.872 120.141,113.872
  region net SDA_0: 120.288,115.253 119.965,115.576 119.886,115.354 120.065,115.174
  region net SCL_0: 122.326,102.297 122.784,102.297 122.682,102.51 122.428,102.51
  region net SDA_0: 121.564,98.487 122.022,98.487 121.92,98.7 121.666,98.7
  region net SCL_0: 122.326,94.527 122.784,94.527 122.682,94.314 122.428,94.314
  region net SDA_0: 121.564,95.416 122.022,95.416 121.92,95.203 121.666,95.203
  region net B1+: 154.407,77.538 153.949,77.538 153.928,77.751 154.428,77.751
  region net B1+: 154.407,78.535 153.949,78.535 153.928,78.748 154.428,78.748
  region net B1+: 154.407,78.132 153.949,78.132 153.928,77.918 154.428,77.918
  region net B1+: 154.407,79.475 153.949,79.475 153.928,79.689 154.428,79.689
  region net B1+: 154.407,79.072 153.949,79.072 153.928,78.859 154.428,78.859
  region net B1+: 154.407,80.049 153.949,80.049 153.928,79.836 154.428,79.836
  region net +3.3V: 106.192,123.406 106.192,122.948 105.978,122.927 105.978,123.427
  region net +3.3V: 106.595,122.948 106.595,123.406 106.808,123.427 106.808,122.927
  region net +3.3V: 105.739,122.948 105.739,123.406 105.952,123.427 105.952,122.927
  region net +3.3V: 112.288,122.948 112.288,123.405 112.075,123.427 112.075,122.927
  region net +3.3V: 112.288,123.406 112.288,122.948 112.075,122.927 112.075,123.427
  region net +3.3V: 112.288,122.948 112.288,123.405 112.075,123.427 112.075,122.927
  region net +3.3V: 112.794,123.158 112.471,123.481 112.606,123.647 112.96,123.294
  region net +3.3V: 111.708,122.948 111.708,123.406 111.921,123.427 111.921,122.927
  region net +3.3V: 111.708,122.948 111.708,123.406 111.921,123.427 111.921,122.927
  region net +3.3V: 111.305,123.406 111.304,122.948 111.091,122.927 111.091,123.427
  region net +3.3V: 111.708,122.948 111.708,123.406 111.921,123.427 111.921,122.927
  region net +3.3V: 118.516,119.419 118.974,119.419 118.995,119.206 118.495,119.206
  region net +3.3V: 119.145,118.782 118.822,118.459 118.656,118.595 119.01,118.948
  region net +3.3V: 118.897,118.68 119.355,118.68 119.376,118.893 118.876,118.893
  region net U3_24: 150.421,92.976 150.42,93.433 150.207,93.332 150.207,93.078
  region net U3_24: 118.637,108.241 118.314,107.917 118.235,108.14 118.414,108.32
  region net U3_23: 117.367,108.241 117.044,107.917 116.965,108.14 117.144,108.32
  region net U3_16: 108.893,139.203 108.89,139.66 108.677,139.631 108.679,139.231
  region net +3.3V: 100.757,132.775 100.473,133.133 100.658,133.244 100.906,132.93
  region net +3.3V: 89.969,124.549 89.968,124.091 89.755,124.12 89.755,124.52
  region net +3.3V: 88.03,127.064 87.707,127.387 87.616,127.256 87.898,126.973
  region net GPIO0: 85.267,126.752 84.944,126.429 85.115,126.298 85.398,126.581
  region net GPIO0: 87.683,124.422 87.682,123.964 87.503,123.993 87.503,124.393
  region net M0_IN2: 90.461,99.18 90.138,98.857 90.36,98.778 90.54,98.958
  region net M0_IN1: 90.179,100.086 89.856,100.409 89.777,100.187 89.956,100.007
  region net M0_IN2: 91.034,96.963 90.576,96.962 90.678,97.176 90.932,97.176
  region net M0_IN1: 90.399,97.471 89.941,97.47 90.043,97.684 90.297,97.684
  region net LO3: 92.382,85.483 92.381,85.94 92.168,85.839 92.168,85.585
  region net LO3: 88.34,85.483 88.34,85.941 88.553,85.839 88.553,85.585
  region net LO3: 88.387,85.888 87.933,85.937 88.056,86.138 88.31,86.111
  region net LO3: 87.299,92.589 86.975,92.265 87.198,92.186 87.378,92.366
  region net LO2: 88.29,92.368 88.747,92.368 88.645,92.189 88.391,92.189
  region net LO2: 97.716,85.483 97.715,85.94 97.502,85.839 97.502,85.585
  region net LO2: 94.182,85.483 94.182,85.941 94.395,85.839 94.395,85.585
  region net LO2: 93.999,86.016 93.676,85.693 93.597,85.916 93.777,86.095
  region net SCL_1: 123.596,112.18 124.054,112.18 123.952,111.967 123.698,111.967
  region net LO1: 102.796,85.941 102.795,85.483 102.582,85.585 102.582,85.839
  region net LO1: 103.226,85.914 102.768,85.913 102.87,86.127 103.124,86.127
  region net LO1: 99.262,85.483 99.262,85.941 99.475,85.839 99.475,85.585
  region net C18_1: 102.463,90.232 102.006,90.231 102.107,90.445 102.361,90.445
  region net C18_1: 98.602,96.272 98.279,95.949 98.501,95.869 98.681,96.049
  region net U7_19: 100.222,90.334 99.899,90.01 99.82,90.233 99.999,90.413
  region net C19_1: 97.046,89.725 96.723,90.049 96.644,89.826 96.824,89.646
  region net C19_1: 91.871,95.383 91.548,95.06 91.731,95.021 91.91,95.201
  region net C19_1: 92.856,90.334 92.533,90.011 92.454,90.234 92.634,90.413
  region net C19_1: 90.957,93.765 91.415,93.765 91.313,93.552 91.059,93.552
  region net U7_19: 92.735,98.337 93.192,98.337 93.09,98.124 92.836,98.124
  region net U7_16: 92.1,96.432 92.558,96.432 92.456,96.219 92.202,96.219
  region net U7_13: 90.322,94.4 90.78,94.4 90.678,94.187 90.424,94.187
  region net U7_16: 95.142,90.334 94.819,90.011 94.74,90.234 94.92,90.413
  region net U7_13: 91.713,90.334 91.39,90.011 91.311,90.234 91.491,90.413
  region net C19_2: 96.189,96.615 95.866,96.938 96.089,97.017 96.268,96.838
  region net C19_2: 98.097,97.04 98.096,97.497 97.883,97.396 97.883,97.142
  region net LED25_2: 158.544,83.104 158.614,82.473 158.21,82.661 158.182,82.915
  region net +5V: 160.226,76.978 160.029,78.768 161.489,78.462 161.582,77.466
  region net LED25_4: 155.887,95.456 156.044,94.84 155.604,95.021 155.54,95.275
  region net +5V: 158.423,89.554 157.978,91.299 159.003,90.786 159.124,89.784
  region net LED25_2: 154.759,88.62 155.374,88.777 155.193,88.338 154.939,88.273
  region net LED24_4: 151.412,107.596 151.653,107.008 151.172,107.175 151.068,107.429
  region net +5V: 154.887,101.757 154.204,103.422 155.239,102.857 155.429,101.849
  region net LED25_4: 152.081,100.693 151.529,100.38 152.031,100.359 152.235,100.513
  region net LED22_2: 146.046,119.097 146.552,118.713 146.405,119.088 146.151,119.184
  region net +5V: 149.687,113.349 148.779,114.903 149.604,114.724 150.042,113.821
  region net LED24_4: 146.268,111.35 146.816,111.671 146.934,111.298 146.707,111.166
  region net LED21_2: 138.278,128.374 138.147,128.995 137.779,128.892 137.833,128.638
  region net +5V: 142.925,124.104 141.809,125.516 143.491,125.154 143.807,124.354
  region net LED22_2: 139.914,121.726 140.412,122.119 140.493,121.697 140.293,121.54
  region net LED20_2: 129.537,137.393 129.997,136.955 129.705,136.932 129.523,137.11
  region net +5V: 133.43,135.057 134.233,133.292 135.753,133.574 135.298,134.574
  region net LED21_2: 131.433,131.432 131.892,130.994 131.79,130.565 131.536,130.807
  region net LED20_4: 119.59,146.041 119.219,145.525 118.844,145.656 119.027,145.91
  region net +5V: 125.266,142.288 123.804,143.338 125.275,144.128 126.096,143.538
  region net LED19_4: 101.342,141.632 101.857,142.003 101.726,141.44 101.472,141.257
  region net +5V: 106.062,146.256 104.6,145.205 104.075,146.306 104.733,146.779
  region net LED20_4: 108.389,143.018 107.88,142.637 108.681,142.76 109.02,143.014
  region net LED17_2: 92.099,133.408 92.558,133.847 92.455,133.222 92.201,132.979
  region net +5V: 95.408,137.954 96.682,137.788 96.538,138.365 95.738,138.417
  region net LED19_4: 98.252,135.139 98.711,135.578 98.922,135.486 98.789,135.232
  region net LED16_2: 83.99,123.895 84.384,124.393 84.534,123.976 84.364,123.786
  region net +5V: 87.096,129.44 85.98,128.028 85.764,129.025 86.297,129.624
  region net LED17_2: 89.981,126.64 89.725,126.316 90.002,126.692 89.981,126.64
  region net LED17_2: 90.119,126.814 89.901,126.438 89.981,126.64 90.119,126.814
  region net LED15_2: 77.279,113.351 76.774,112.965 76.877,112.564 77.131,112.759
  region net +5V: 79.55,119.22 78.657,117.693 78.523,118.629 79.015,119.269
  region net LED16_2: 83.003,117.202 82.501,117.495 82.94,117.68 83.167,117.547
  region net LED15_4: 71.86,101.417 71.258,101.618 71.597,101.281 71.851,101.239
  region net +5V: 73.449,107.925 72.816,106.383 71.775,106.6 71.939,107.4
  region net LED15_2: 76.617,106.77 77.169,106.456 77.433,106.745 77.203,106.875
  region net LED12_2: 65.858,76.948 66.49,76.878 66.301,76.516 66.047,76.544
  region net +5V: 66.314,83.632 66.128,81.948 64.953,82.239 65.041,83.039
  region net LED14_4: 70.236,82.709 70.301,83.298 70.724,83.658 70.68,83.254
  region net LED11_2: 79.203,62.359 79.16,61.725 79.564,62.052 79.582,62.306
  region net +5V: 72.784,64.122 74.428,63.39 73.006,62.634 72.163,63.205
  region net LED12_2: 74.205,66.773 74.246,67.407 73.886,67.081 73.878,66.827
  region net LED10_2: 91.072,58.505 90.461,58.68 90.935,58.941 91.214,58.861
  region net +5V: 84.552,59.335 86.282,58.838 86.054,58.153 85.054,58.296
  region net LED11_2: 85.569,62.881 86.187,63.027 85.707,63.305 85.416,63.237
  region net LED10_4: 103.54,56.304 102.911,56.392 103.406,56.707 103.721,56.663
  region net +5V: 96.871,56.231 98.654,55.981 98.289,55.467 97.292,55.556
  region net LED10_2: 97.976,60.115 97.428,60.192 97.293,60.349 97.591,60.41
  region net LED9_4: 116.303,55.067 116.303,55.702 116.684,55.511 116.684,55.257
  region net +5V: 109.503,54.883 111.303,54.883 110.903,54.343 109.903,54.343
  region net LED10_4: 109.956,58.883 109.782,58.825 109.587,58.883 109.956,58.883
  region net LED10_4: 109.956,58.883 110.052,58.915 110.222,58.883 109.956,58.883
  region net LED7_2: 128.927,56.287 128.838,56.915 129.24,56.728 129.257,56.474
  region net +5V: 122.201,55.285 123.983,55.535 123.522,54.667 122.522,54.597
  region net LED9_4: 121.652,59.191 121.74,58.562 121.329,58.75 121.293,59.004
  region net RGB_IN: 152.615,65.036 152.109,64.811 152.272,65.3 152.526,65.413
  region net +5V: 146.81,61.357 148.454,62.089 147.929,60.662 146.929,60.439
  region net LED6_2: 145.425,64.466 145.384,65.1 145.006,65.046 145.022,64.792
  region net LED14_4: 68.422,89.583 68.579,90.198 68.85,89.72 68.777,89.434
  region net +5V: 69.038,96.046 68.618,94.399 67.45,94.677 67.654,95.477
  region net LED15_4: 72.725,95.21 72.791,94.578 73.118,95.114 73.084,95.44
  region net LED6_2: 140.445,60.143 141.064,60 141.217,60.355 140.926,60.423
  region net +5V: 134.718,57.46 136.448,57.956 135.945,56.899 134.945,56.756
  region net LED7_2: 133.615,61.305 133.769,60.769 133.322,60.947 133.249,61.201
  region net +5V: 135.528,131.575 135.546,130.371 137.044,130.472 137.029,131.472
  region net +5V: 107.797,145.75 108.257,146.713 107.298,147.49 106.932,146.724
  region net +5V: 98.833,139.682 98.143,139.103 97.301,139.963 97.916,140.48
  region net +5V: 89.747,130.995 89.145,130.326 88.342,131.228 88.878,131.824
  region net +5V: 81.455,120.382 82.342,120.869 81.409,121.726 80.679,121.325
  region net +5V: 75.224,109.465 76.338,109.923 75.305,110.736 74.621,110.288
  region net +5V: 70.852,98.643 70.574,97.787 69.32,97.811 69.58,98.611
  region net +5V: 67.988,85.505 67.75,86.461 66.543,86.341 66.742,85.542
  region net +5V: 71.419,65.889 70.994,67.016 69.837,65.833 70.224,64.806
  region net +5V: 83.224,61.647 82.107,61.197 82.166,59.604 83.166,60.007
  region net +5V: 95.235,58.336 94.191,57.735 94.241,56.033 95.233,56.604
  region net +5V: 132.537,57.936 131.487,58.526 131.511,56.792 132.511,56.23
  region net +5V: 144.584,61.524 143.462,61.963 143.522,60.329 144.522,59.938
  region net B3+: 71.758,74.607 72.608,73.135 73.434,74.703 72.917,75.6
  region net B3+: 71.758,74.607 71.94,72.749 73.424,72.977 73.327,73.977
  region net B3+: 92.476,105.754 91.674,106.564 90.452,106.659 90.463,105.659

## Silkscreen, mask and mechanical layers (free items; w line width, h text height)
Top Overlay:
  text "+-" at 114.672,147.272 h2.03 r195
  text "GND" at 109.855,137.909 h1 r90
  text "RXD" at 109.855,135.242 h1 r90
  text "TXD" at 109.855,132.575 h1 r90
  text "RESET" at 86.106,117.208 h1.14 r55
  text "BOOT" at 79.248,105.778 h1.14 r65
  text "+-" at 71.799,74.198 h2.03 r315
  text "+-" at 152.111,70.971 h2.03 r75
Document:
  lines w0.254: 62.992,67.043 149.73,117.121 ; 76.165,117.081 162.903,67.003 ; 112.903,53.653 112.903,153.605

## Text inside footprints (layer, text, board x,y; h text height)
P1: Top Overlay "MPU6050" at 106.807,66.154 h2.03
U6: Top Overlay "GND" at 104.902,99.69 h1; Top Overlay "VCC" at 105.029,90.419 h1; Top Overlay "SDA" at 121.031,96.134 h1; Top Overlay "SCL" at 121.031,93.594 h1